# Altium PCB PicoROM.PcbDoc
Units mm, origin at the board's own origin, x right, y up, seen from the top; angles counter-clockwise.
Board outline 30.97 x 12.2 mm, 4 copper layers (Top Layer, Inner 1, Inner 2, Bottom Layer), stack 0.97 mm thick; 58 components, 157 nets, 379 pads, 126 vias.
Unrouted connection lines stored in the file: 10.
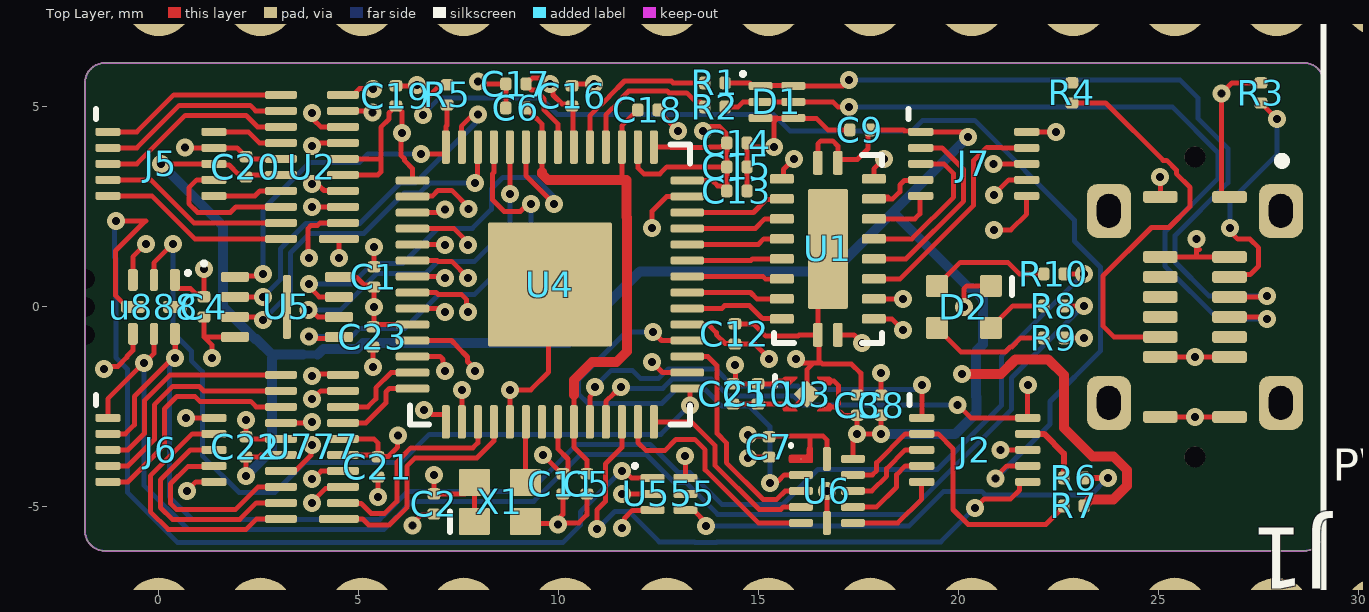
[diagram p0: Top Layer view]
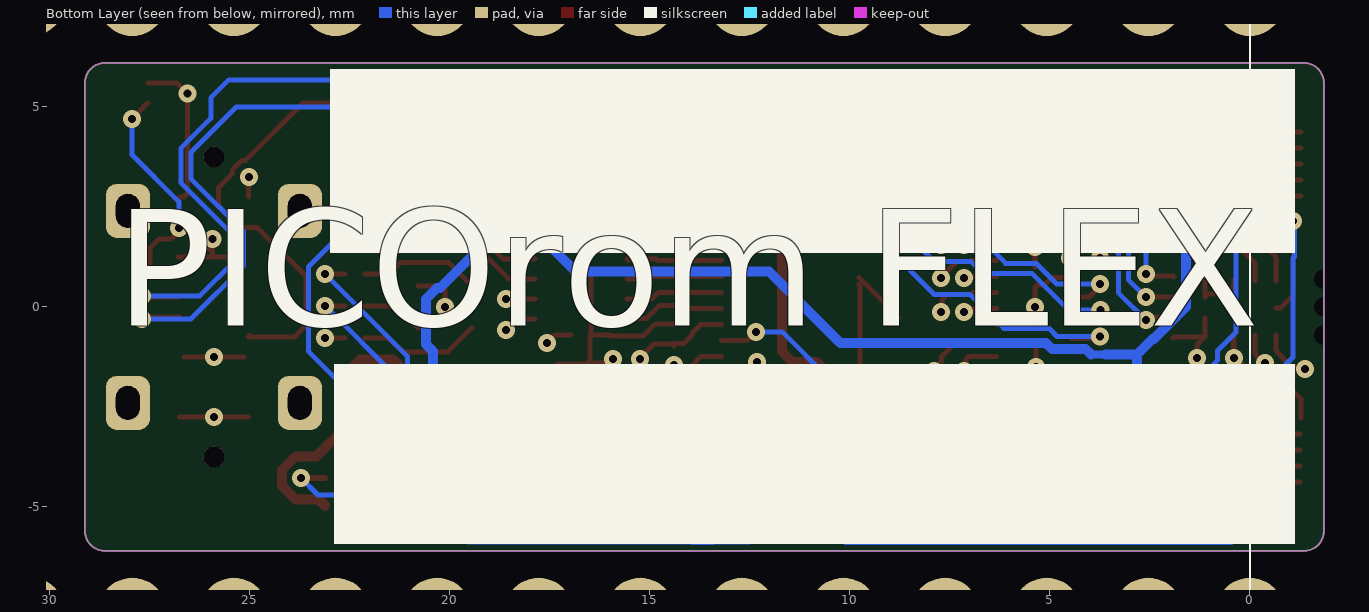
[diagram p1: Bottom Layer view, seen from below]
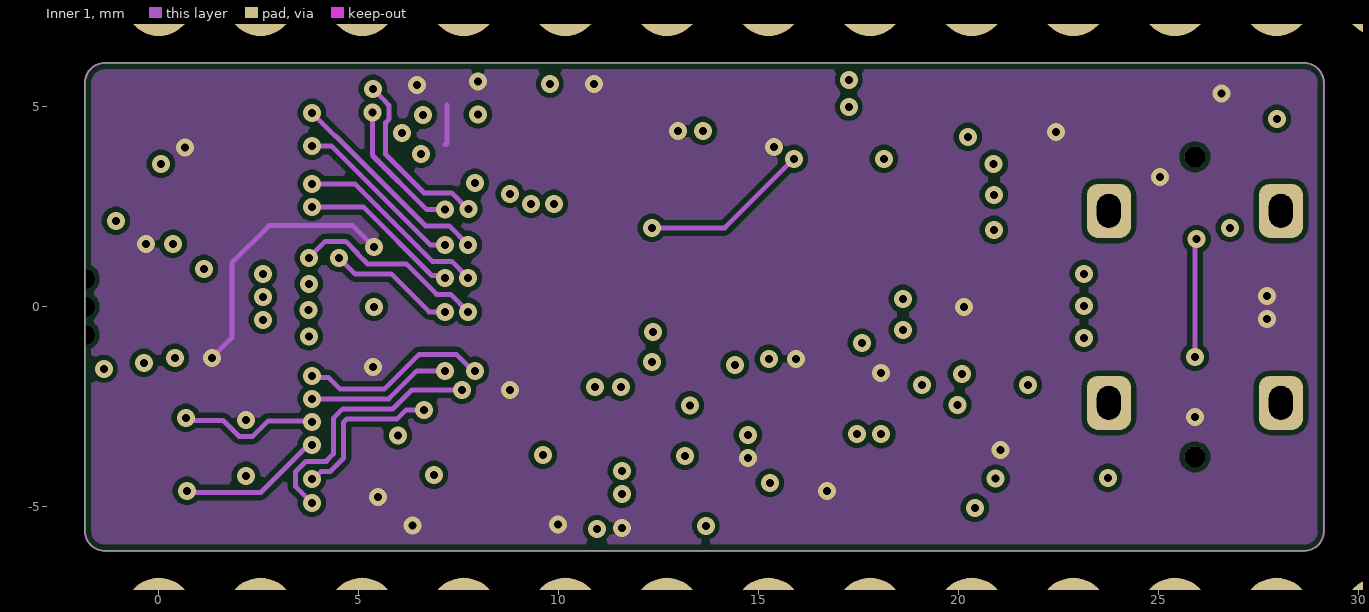
[diagram p2: Inner 1]
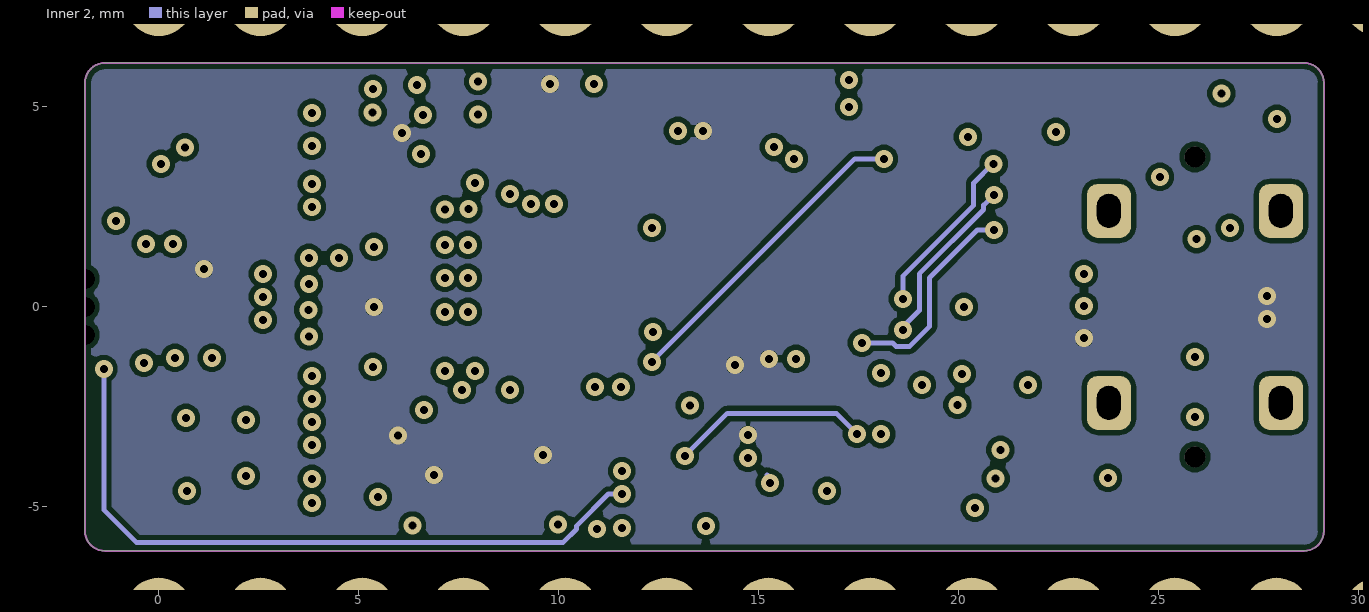
[diagram p3: Inner 2]

## Layer stack, top to bottom
F.Mask: solder mask 0.0102, Solder Resist, Dk 3.5
Top Layer: signal copper 0.035
Dielectric 1: dielectric 0.16, FR-4, Dk 4.8
Inner 1: signal copper 0.035
Dielectric3: dielectric 0.51, FR-4, Dk 4.8
Inner 2: signal copper 0.035
Dielectric5: dielectric 0.16, FR-4, Dk 4.8
Bottom Layer: signal copper 0.035
B.Mask: solder mask 0.0102, Solder Resist, Dk 3.5

## Board outline
-1.85,-5.6 -1.85,5.6 cw(c-1.35,5.6) -1.35,6.1 28.625,6.1 cw(c28.625,5.6) 29.125,5.6 29.125,-5.6 cw(c28.625,-5.6) 28.625,-6.1 -1.35,-6.1 cw(c-1.35,-5.6)

## Design rules (kind name [scope] priority, off if disabled: settings)
Clearance [All] p1: gap=0.125 ignorepadtopadclearanceinfootprint=FALSE
MinimumSolderMaskSliver [All] p1: minsoldermaskwidth=0
PolygonConnect Polygon_In2.Cu-+3V3_ConnectDirect [IsNamedPolygon('In2.Cu-+3V3') vs IsVia] p1: connectstyle=Direct reliefconductorwidth=0.254 reliefentries=4 polygonreliefangle="90 Angle" airgapwidth=0.254
PolygonConnect Polygon_In2.Cu-+3V3_ConnectRelief45 [IsNamedPolygon('In2.Cu-+3V3') vs (IsThruPin or IsSMTPin) and (PadShape_AllLayers = 'Round')] p2: connectstyle=Relief reliefconductorwidth=0.5 reliefentries=4 polygonreliefangle="45 Angle" airgapwidth=0.5
PolygonConnect Polygon_In2.Cu-+3V3_ConnectRelief90 [IsNamedPolygon('In2.Cu-+3V3') vs (IsThruPin or IsSMTPin) and (PadShape_AllLayers <> 'Round')] p3: connectstyle=Relief reliefconductorwidth=0.5 reliefentries=4 polygonreliefangle="90 Angle" airgapwidth=0.5
PolygonConnect Polygon_In4.Cu-GND_ConnectDirect [IsNamedPolygon('In4.Cu-GND') vs IsVia] p4: connectstyle=Direct reliefconductorwidth=0.254 reliefentries=4 polygonreliefangle="90 Angle" airgapwidth=0.254
PolygonConnect Polygon_In4.Cu-GND_ConnectRelief45 [IsNamedPolygon('In4.Cu-GND') vs (IsThruPin or IsSMTPin) and (PadShape_AllLayers = 'Round')] p5: connectstyle=Relief reliefconductorwidth=0.508 reliefentries=4 polygonreliefangle="45 Angle" airgapwidth=0.508
PolygonConnect Polygon_In4.Cu-GND_ConnectRelief90 [IsNamedPolygon('In4.Cu-GND') vs (IsThruPin or IsSMTPin) and (PadShape_AllLayers <> 'Round')] p6: connectstyle=Relief reliefconductorwidth=0.508 reliefentries=4 polygonreliefangle="90 Angle" airgapwidth=0.508
PolygonConnect Polygon_In1.Cu-GND_ConnectDirect [IsNamedPolygon('In1.Cu-GND') vs IsVia] p7: connectstyle=Direct reliefconductorwidth=0.254 reliefentries=4 polygonreliefangle="90 Angle" airgapwidth=0.254
PolygonConnect Polygon_In1.Cu-GND_ConnectRelief45 [IsNamedPolygon('In1.Cu-GND') vs (IsThruPin or IsSMTPin) and (PadShape_AllLayers = 'Round')] p8: connectstyle=Relief reliefconductorwidth=0.508 reliefentries=4 polygonreliefangle="45 Angle" airgapwidth=0.508
PolygonConnect Polygon_In1.Cu-GND_ConnectRelief90 [IsNamedPolygon('In1.Cu-GND') vs (IsThruPin or IsSMTPin) and (PadShape_AllLayers <> 'Round')] p9: connectstyle=Relief reliefconductorwidth=0.508 reliefentries=4 polygonreliefangle="90 Angle" airgapwidth=0.508
PolygonConnect Polygon_F.Cu-+3V3_ConnectDirect [IsNamedPolygon('F.Cu-+3V3')] p10: connectstyle=Direct reliefconductorwidth=0.254 reliefentries=4 polygonreliefangle="90 Angle" airgapwidth=0.254
PolygonConnect Polygon_F.Cu-GND_ConnectDirect [IsNamedPolygon('F.Cu-GND')] p11: connectstyle=Direct reliefconductorwidth=0.254 reliefentries=4 polygonreliefangle="90 Angle" airgapwidth=0.254
RoutingVias [All] p1: holewidth=0.25 width=0.45 viastyle="Through Hole" minholewidth=0.2 minwidth=0.45 maxholewidth=0.4 maxwidth=0.8
SilkToSilkClearance [All] p1: silktosilkclearance=0
SilkToSolderMaskClearance [IsPad] p1: minsilkscreentomaskgap=0 clearancetoexposedcopper=TRUE
SolderMaskExpansion [All] p1: expansion=0.102 istentingtop=FALSE
SupplyNets "Schematic Supply Nets_9" [InNet('EXTRES')] p1: voltage=0.000
SupplyNets "Schematic Supply Nets_8" [InNet('RESET')] p2: voltage=0.000
SupplyNets "Schematic Supply Nets_7" [InNet('VUSB')] p3: voltage=0.000
SupplyNets "Schematic Supply Nets_6" [InNet('BOOT')] p4: voltage=0.000
SupplyNets "Schematic Supply Nets_5" [InNet('SWD')] p5: voltage=0.000
SupplyNets "Schematic Supply Nets_4" [InNet('SWC')] p6: voltage=0.000
SupplyNets "Schematic Supply Nets_3" [InNet('P1V1')] p7: voltage=0.000
SupplyNets "Schematic Supply Nets_2" [InNet('GND')] p8: voltage=0.000
SupplyNets "Schematic Supply Nets_1" [InNet('P3V3')] p9: voltage=0.000
SupplyNets "Schematic Supply Nets" [InNet('P5V')] p10: voltage=0.000
Width [All] p1: maxlimit=5 minlimit=0.125 preferedwidth=0.125
27 further rules are at their usual default settings.

## Classes and differential pairs
component class 2716-2736: *1 J8 J9 J11 J12

## Components (designator, comment, footprint, x,y, rotation, side; value= is the part's Value field where it differs from the comment)
C1 "CAP0201" CAPC0201 5.375,0.75 r90 top
C2 "CAP0201" CAPC0201 6.875,-4.925 r270 top
C3 "CAP0201" CAPC0201 17.457,-2.457 r90 top
C4 "CAP0201" CAPC0201 1.125,0 r270 top
C5 "CAP0201" CAPC0201 10.7,-4.425 r270 top
C6 "CAP0201" CAPC0201 8.925,4.975 r180 top
C7 "CAP0201" CAPC0201 15.25,-3.5 r270 top
C8 "CAP0201" CAPC0201 18.057,-2.457 r90 top
C9 "CAP0201" CAPC0201 17.525,4.425 r180 top
C10 "CAP0201" CAPC0201 14.975,-2.175 r270 top
C11 "CAP0201" CAPC0201 10.1,-4.425 r270 top
C12 "CAP0201" CAPC0201 14.4,-0.675 r90 top
C13 "CAP0201" CAPC0201 14.45,2.9 r0 top
C14 "CAP0201" CAPC0201 14.45,4.1 r0 top
C15 "CAP0201" CAPC0201 14.45,3.5 r0 top
C16 "CAP0201" CAPC0201 10.325,5.275 r90 top
C17 "CAP0201" CAPC0201 8.925,5.575 r180 top
C18 "CAP0201" CAPC0201 12.225,4.925 r0 top
C19 "CAP0201" CAPC0201 5.925,5.275 r90 top
C20 "CAP0201" CAPC0201 2.175,3.5 r90 top
C21 "CAP0201" CAPC0201 5.475,-4 r270 top
C22 "CAP0201" CAPC0201 2.175,-3.5 r90 top
C23 "CAP0201" CAPC0201 5.35,-0.75 r270 top
C24 "CAP0201" CAPC0201 24.325,13.825 r270 top
C25 "CAP0201" CAPC0201 14.35,-2.175 r270 top
D1 "CDDFN6-3312P" SON40P100X50-6L 15.45,5.125 r0 top
D2 "RGB" LED-1616-RGB 20.125,0 r0 top
J1 "CONN-SAMESKY-UJ20-C-V-G-SMT-P16-TR" CONN-SAMESKY-UJ20-C-V-G-SMT-P16-TR 25.9,0 r270 top
J2 "CONN-HIROSE-DF37NC-10DS" CONN-HIROSE-DF37NC-10DS 20.395,-3.575 r0 top
J3 "Conn_01x16" PinHeader_1x16_P2.54mm_Vertical 38.1,7.62 r270 bottom
J4 "Conn_01x16" PinHeader_1x16_P2.54mm_Vertical 38.1,-7.62 r270 bottom
J5 "CONN-HIROSE-DF37NC-10DS" CONN-HIROSE-DF37NC-10DS 0.05,3.575 r0 top locked
J6 "CONN-HIROSE-DF37NC-10DS" CONN-HIROSE-DF37NC-10DS 0.05,-3.575 r0 top locked
J7 "CONN-HIROSE-DF37NC-10DS" CONN-HIROSE-DF37NC-10DS 20.37,3.575 r0 top
J8 "CONN-HIROSE-DF37C-10DP-04V" CONN-HIROSE-DF37NC-10DS 47.166,-2.202 r0 top
J9 "CONN-HIROSE-DF37C-10DP-04V" CONN-HIROSE-DF37NC-10DS 42.9,-6.875 r0 top
J11 "CONN-HIROSE-DF37C-10DP-04V" CONN-HIROSE-DF37NC-10DS 45.05,4.25 r0 top
J12 "CONN-HIROSE-DF37C-10DP-04V" CONN-HIROSE-DF37NC-10DS 47.225,-7.825 r0 top
R1 "RESC0201" RESC0201 13.9,5.6 r180 top value=27R
R2 "RESC0201" RESC0201 13.9,5 r180 top value=27R
R3 "RESC0201" RESC0201 27.55,5.35 r270 top value=5K1
R4 "RESC0201" RESC0201 22.825,5.35 r90 top value=5K1
R5 "RESC0201" RESC0201 7.205,5.3 r270 top value=1K
R6 "RESC0201" RESC0201 22.875,-4.275 r0 top value=27R
R7 "RESC0201" RESC0201 22.875,-4.975 r0 top value=100K
R8 "RESC0201" RESC0201 22.375,0.025 r0 top value=1K
R9 "RESC0201" RESC0201 22.375,-0.775 r0 top value=1K
R10 "RESC0201" RESC0201 22.375,0.825 r0 top value=1K
U1 "74AHCT245" QFN50P450X250-20TH300X100 16.725,1.45 r0 top
U2 "IC-TI-TXB0108-DQS" SON40P200X55-20N 3.825,3.5 r180 top locked
U3 "TPS7A0233PDQNR" X2SON4-1X1 16.207,-2.182 r0 top
U4 "IC-RPI-RP2040-PICOROM" QFN40P700X700X90-56N-TH310X310 9.775,0.56 r0 top locked
U5 "IC-WINBOND-W25Q128JVS" SON50P300X60_HS-9N 3.2,0 r0 top locked
U6 "IC-TI-TXB0104-RUT" FOOTPRINT-TI-RUT 16.7,-4.6 r0 top
U555 "74LVC1G126" SON40P100X50-6L 12.75,-4.675 r0 top
U777 "IC-TI-TXB0108-DQS" SON40P200X55-20N 3.825,-3.5 r180 top locked
u888 "TCA5405RUGR" PQFN50P150X150X40-8N -0.125,0 r270 top (schematic designator U888)
X1 "XOSC" XOSC-YXC-2016 8.525,-4.875 r0 top locked

## Footprints (in the part's own frame and the unit in brackets; to place one, negate y for a bottom-side part, rotate by r counter-clockwise, add the part's x,y. Pads: shape width x height; smd on the part's side, far side on the other; paste and mask are expansions set on the pad)
CAPC0201 [mm]
  rrect50% 0.28x0.32 smd mask+0.05: 1(-0.253,0) 2(0.253,0)
  body extent -0.32,-0.16 0.31,0.17, height 0.33
CONN-HIROSE-DF37NC-10DS [mm]
  rrect50% 0.63x0.2 smd paste-2539.97 mask+0.05: 1(-1.325,0.8) 2(1.325,0.8) 3(-1.325,0.4) 4(1.325,0.4) 5(-1.325,0) 6(1.325,0) 7(-1.325,-0.4) 8(1.325,-0.4) 9(-1.325,-0.8) 10(1.325,-0.8)
  silkscreen extent -1.63,1.12 -1.63,1.38, body extent -1.49,-2.11 1.49,2.11, height 0.99
CONN-SAMESKY-UJ20-C-V-G-SMT-P16-TR [mm]
  rrect50% 0.3x0.87 smd mask+0.05: A1(-2.75,0.865) A4(-1.25,0.865) A5(-0.75,0.865) A6(-0.25,0.865) A7(0.25,0.865) A8(0.75,0.865) A9(1.25,0.865) A12(2.75,0.865) B1(2.75,-0.865) B4(1.25,-0.865) B5(0.75,-0.865) B6(0.25,-0.865) B7(-0.25,-0.865) B8(-0.75,-0.865) B9(-1.25,-0.865) B12(-2.75,-0.865)
  rrect50% 1.35x1.1 hole 0.6 slot 0.85 at 0 deg mask+0.1: SH1(-2.4,2.15) SH2(2.4,2.15) SH3(-2.4,-2.15) SH4(2.4,-2.15)
  round 0.52 hole 0.52 unplated mask+0.15: ""(-3.75,0) ""(3.75,0)
  silkscreen extent -3.75,2.08 -3.55,2.27, body extent -4.48,-2.3 4.47,2.3, height 6.41
FOOTPRINT-TI-RUT [mm] "R-PUQFN-N12, TI RUT"
  round 0.025 smd paste+0 mask+0.05: 1(-0.65,0.8)
  rrect50% 0.6x0.2 smd paste+0 mask+0.05: 2(-0.65,0.4) 3(-0.65,0) 4(-0.65,-0.4) 5(-0.65,-0.8) 7(0.65,-0.8) 8(0.65,-0.4) 9(0.65,0) 10(0.65,0.4) 11(0.65,0.8)
  rrect50% 0.2x0.6 smd paste+0 mask+0.05: 6(0,-0.8) 12(0,0.8)
  Top Layer region: -0.9,0.9 -0.919,0.896 -0.935,0.885 -0.946,0.869 -0.95,0.85 -0.95,0.85 -0.95,0.75 -0.946,0.731 -0.935,0.715 -0.919,0.704 -0.9,0.7 -0.9,0.7 -0.4,0.7 -0.381,0.704 -0.365,0.715 -0.354,0.731 -0.35,0.75 -0.35,0.75 -0.35,1.05 -0.354,1.069 -0.365,1.085 -0.381,1.096 -0.4,1.1 -0.4,1.1 -0.45,1.1 -0.469,1.096 -0.485,1.085 -0.496,1.069 -0.5,1.05 -0.5,1.05 -0.5,0.95 -0.504,0.931 -0.515,0.915 -0.531,0.904 -0.55,0.9 -0.55,0.9
  silkscreen extent -0.9,1.12 -0.9,1.15, body extent -0.85,-1 0.85,1, height 0.55
LED-1616-RGB [mm]
  rrect18% 0.55x0.55 smd paste+0 mask+0.05: 1(0.675,0.525) 2(-0.675,0.525) 3(-0.675,-0.525) 4(0.675,-0.525)
  silkscreen extent 1.2,0.3 1.2,0.72, body extent -0.8,-0.8 0.8,0.8, height 0.71
PinHeader_1x16_P2.54mm_Vertical [mm]
  round 1.7 hole 1 paste-2539.97 mask+0.051: 1(0,0)
  rrect100% 1.7x1.7 hole 1 paste-2539.97 mask+0.051: 2(0,2.54) 3(0,5.08) 4(0,7.62) 5(0,10.16) 6(0,12.7) 7(0,15.24) 8(0,17.78) 9(0,20.32) 10(0,22.86) 11(0,25.4) 12(0,27.94) 13(0,30.48) 14(0,33.02) 15(0,35.56) 16(0,38.1)
PQFN50P150X150X40-8N [mm] "PQFN, 8-Leads, Body 1.50x1.50mm, Pitch 0.50mm, IPC Medium Density"
  rrect50% 0.55x0.25 smd mask+0.05: 1(-0.675,0.525) 3(-0.675,-0.525) 5(0.675,-0.525) 7(0.675,0.525)
  rrect50% 0.55x0.2 smd mask+0.05: 2(-0.675,0) 6(0.675,0)
  rrect50% 0.3x0.6 smd mask+0.05: 4(0,-0.525) 8(0,0.525)
  silkscreen extent -0.9,0.8 -0.8,0.9, body extent -0.75,-0.75 0.75,0.75, height 0.4
QFN40P700X700X90-56N-TH310X310 [mm]
  rrect50% 0.84x0.2 smd mask+0.05: 1(-3.435,2.6) 2(-3.435,2.2) 3(-3.435,1.8) 4(-3.435,1.4) 5(-3.435,1) 6(-3.435,0.6) 7(-3.435,0.2) 8(-3.435,-0.2) 9(-3.435,-0.6) 10(-3.435,-1) 11(-3.435,-1.4) 12(-3.435,-1.8) 13(-3.435,-2.2) 14(-3.435,-2.6) 29(3.435,-2.6) 30(3.435,-2.2) 31(3.435,-1.8) 32(3.435,-1.4) 33(3.435,-1) 34(3.435,-0.6) 35(3.435,-0.2) 36(3.435,0.2) 37(3.435,0.6) 38(3.435,1) 39(3.435,1.4) 40(3.435,1.8) 41(3.435,2.2) 42(3.435,2.6)
  rrect50% 0.2x0.84 smd mask+0.05: 15(-2.6,-3.435) 16(-2.2,-3.435) 17(-1.8,-3.435) 18(-1.4,-3.435) 19(-1,-3.435) 20(-0.6,-3.435) 21(-0.2,-3.435) 22(0.2,-3.435) 23(0.6,-3.435) 24(1,-3.435) 25(1.4,-3.435) 26(1.8,-3.435) 27(2.2,-3.435) 28(2.6,-3.435) 43(2.6,3.435) 44(2.2,3.435) 45(1.8,3.435) 46(1.4,3.435) 47(1,3.435) 48(0.6,3.435) 49(0.2,3.435) 50(-0.2,3.435) 51(-0.6,3.435) 52(-1,3.435) 53(-1.4,3.435) 54(-1.8,3.435) 55(-2.2,3.435) 56(-2.6,3.435)
  rrect3% 3.1x3.1 smd paste-0.57 mask+0.05: 57(0,0)
  silkscreen extent -3.5,-3.5 3.5,3.5, body extent -3.5,-3.5 3.5,3.5, height 0.9
QFN50P450X250-20TH300X100 [mm]
  rrect41% 0.24x0.6 smd mask+0.051: 1(-0.25,2.15) 10(-0.25,-2.15) 11(0.25,-2.15) 20(0.25,2.15)
  rrect41% 0.6x0.24 smd mask+0.051: 2(-1.15,1.75) 3(-1.15,1.25) 4(-1.15,0.75) 5(-1.15,0.25) 6(-1.15,-0.25) 7(-1.15,-0.75) 8(-1.15,-1.25) 9(-1.15,-1.75) 12(1.15,-1.75) 13(1.15,-1.25) 14(1.15,-0.75) 15(1.15,-0.25) 16(1.15,0.25) 17(1.15,0.75) 18(1.15,1.25) 19(1.15,1.75)
  rrect10% 1x3 smd mask+0.051: 21(0,0)
  silkscreen extent -1.35,-2.35 1.35,2.35, body extent -1.25,-2.25 1.25,2.25, height 0.9
RESC0201 [mm] "RES, 0201 Chip Resistor, 2-Leads, Body 0.60x0.30mm, IPC High Density"
  rrect50% 0.28x0.32 smd mask+0.05: 1(-0.253,0) 2(0.253,0)
  body extent -0.32,-0.16 0.32,0.16, height 0.26
SON40P100X50-6L [mm] "SON, 6-Leads, Body 1.20x1.00mm, Pitch 0.40mm, IPC High Density"
  rrect50% 0.6x0.2 smd mask+0.05: 1(-0.41,0.4) 2(-0.41,0) 3(-0.41,-0.4) 4(0.41,-0.4) 5(0.41,0) 6(0.41,0.4)
  silkscreen extent -0.9,0.65 -0.8,0.75, body extent -0.55,-0.6 0.55,0.6, height 0.5
SON40P200X55-20N [mm] "SON, 20-Leads, Body 4.00x2.00mm, Pitch 0.40mm, IPC Medium Density"
  rrect50% 1x0.2 smd mask+0.05: 1(-0.675,1.8)
  rrect50% 0.8x0.2 smd mask+0.05: 2(-0.775,1.4) 3(-0.775,1) 4(-0.775,0.6) 5(-0.775,0.2) 6(-0.775,-0.2) 7(-0.775,-0.6) 8(-0.775,-1) 9(-0.775,-1.4) 10(-0.775,-1.8) 11(0.775,-1.8) 12(0.775,-1.4) 13(0.775,-1) 14(0.775,-0.6) 15(0.775,-0.2) 16(0.775,0.2) 17(0.775,0.6) 18(0.775,1) 19(0.775,1.4) 20(0.775,1.8)
  body extent -1.05,-2 1.05,2, height 0.55
SON50P300X60_HS-9N [mm] "SON, 8-Leads, Body 2.00x3.00mm, Pitch 0.50mm, Thermal Pad 1.60x0.20mm, IPC Medium Density"
  rrect40% 0.7x0.25 smd mask+0.05: 1(-1.3,0.75) 2(-1.3,0.25) 3(-1.3,-0.25) 4(-1.3,-0.75) 5(1.3,-0.75) 6(1.3,-0.25) 7(1.3,0.25) 8(1.3,0.75)
  rrect50% 0.2x1.6 smd mask+0.05: 9(0,0)
  silkscreen extent -2.12,1.04 -2.02,1.14, body extent -1.55,-1 1.55,1, height 0.6
X2SON4-1X1 [mm] "FOOTPRINT, TI, DQN0004A X2SON4"
  round 0.025 smd mask+0.05: 1(-0.43,0.325) 2(-0.43,-0.325) 3(0.43,-0.325) 4(0.43,0.325)
  rrect4% 0.48x0.48 smd rot 45 mask+0.05: 5(0,0)
  Top Layer region: 0.43,-0.22 0.25,-0.4 0.25,-0.43 0.559,-0.43 0.579,-0.426 0.595,-0.415 0.606,-0.399 0.61,-0.379 0.61,-0.379 0.61,-0.271 0.606,-0.251 0.595,-0.235 0.579,-0.224 0.559,-0.22 0.559,-0.22 0.52,-0.22
  Top Layer region: -0.43,-0.22 -0.25,-0.4 -0.25,-0.43 -0.559,-0.43 -0.579,-0.426 -0.595,-0.415 -0.606,-0.399 -0.61,-0.379 -0.61,-0.379 -0.61,-0.271 -0.606,-0.251 -0.595,-0.235 -0.579,-0.224 -0.559,-0.22 -0.559,-0.22 -0.52,-0.22
  Top Layer region: -0.43,0.22 -0.25,0.4 -0.25,0.43 -0.559,0.43 -0.579,0.426 -0.595,0.415 -0.606,0.399 -0.61,0.379 -0.61,0.379 -0.61,0.271 -0.606,0.251 -0.595,0.235 -0.579,0.224 -0.559,0.22 -0.559,0.22 -0.52,0.22
  Top Layer region: 0.43,0.22 0.25,0.4 0.25,0.43 0.559,0.43 0.579,0.426 0.595,0.415 0.606,0.399 0.61,0.379 0.61,0.379 0.61,0.271 0.606,0.251 0.595,0.235 0.579,0.224 0.559,0.22 0.559,0.22 0.52,0.22
  silkscreen extent -0.8,0.2 -0.8,0.46, body extent -0.5,-0.5 0.5,0.5, height 0.4
XOSC-YXC-2016 [mm] "YSO110TR"
  rrect10% 0.775x0.675 smd paste+0 mask+0.05: 1(-0.637,-0.487) 2(0.637,-0.487) 3(0.637,0.487) 4(-0.637,0.487)
  silkscreen extent -1.25,-0.75 -1.25,-0.24, body extent -1,-0.8 1,0.8, height 0.76

## Part data
C1 C2 C3 C4 C5 C6 C7 C8 C9 C10 C11 C12 C13 C14 C15 C16 C17 C18 C19 C20 C21 C22 C23 C24 C25: library part CAPC-0201-100nF-16V, "CAPACITOR,CERAMIC,100nF,16V,X7R,0201", Capacitance=100nF, Dielectric=X7R, LCSC=C668346, Package / Case=0402, Supplier Part Number 1=490-GRM033Z71C104KE14DCT-ND, Voltage=16V, Supplier 1=Digikey
D1: library part TVS-BOURNS-CDDFN6-3312P, LCSC=C3700524
D2: library part LED-TOGIALED-TJ-S1615CY6TGLCCSRGB-A5, LCSC=C601684, MFR=KINGBRIGHT, MPN=APTF1616SEKJ3ZGKQBKC
J1: LCSC=C2686963, MFR=SAMESKY, MPN=UJ20-C-V-G-SMT-P16-TR, Package=None, Availability=Unavailable, MP=UJ20-C-V-G-SMT-P16-TR, Price=None
J2 J5 J6 J7: LCSC=C324718
J8 J9 J11 J12: LCSC=C324719
R1 R2 R6: library part RESC-0201-27R-1%-1/10W, "RESISTOR,27R,1%,63mW,0201", LCSC=C473051, Power=1/16W, Tolerance=1%
R3 R4: library part RESC-0201-5K1-1%-1/10W, "RESISTOR,5K1,1%,63mW,0201", LCSC=C274341, Power=1/16W, Tolerance=1%
R5 R8 R9 R10: library part RESC-0201-1K-1%-1/10W, "RESISTOR,1K,1%,63mW,0201", LCSC=C138165, Power=1/16W, Tolerance=1%
R7: library part RESC-0201-100K-1%-1/10W, "RESISTOR,100K,1%,63mW,0201", LCSC=C106224, Power=1/16W, Tolerance=1%
U1: library part IC-NEXPERIA-74AHCT245
U3: library part IC-TI-TPS7A0233PDQNR, LCSC=C2860046
U4: LCSC=C2040
U555: library part IC-DIODES-74LVC1G126-SON6, MPN=C163712
u888: library part IC-TI-TCA5405RUGR, MPN=C2674123
X1: library part XOSC-YXC-OT201612MJBA4SL, "XTAL,4PIN", LCSC=C669076

## Free pads (board coordinates)
  rrect0% 0x0 hole 0.5 unplated paste-2539.97 mask+0.15: MB(-1.85,-0.7) MB(-1.85,0) MB(-1.85,0.7)

## Via types
v1: diameter 0.45, hole 0.2, Top Layer to Bottom Layer, tented both sides, 126 vias

## Nets (pads, with @x,y where several pads share a name; then routed paths per layer and width w, separated by ;. In a path a pad name is that pad's centre, name@x,y a point inside that pad or via, vN(x,y) a via of type N, cw(c..) or ccw(c..) an arc to the next point about the centre after c; other vN are vias at no path point)
A0: U2.10 U4.2 | length 7.3
  Top Layer w0.125: U2.10@4.325,5.3 4.9,5.3 4.938,5.338 4.938,5.383 5.011,5.456 5.344,5.456 v1(5.35,5.45) ; U4.2 6.35,2.77 6.836,2.77 6.979,2.913 7.321,2.913 7.736,2.497 v1(7.736,2.447)
  Inner 1 w0.125: v1(5.35,5.45) 5.67,5.13 5.67,5.117 5.754,5.033 5.754,4.692 5.67,4.608 5.67,3.809 6.629,2.85 7.321,2.85 7.724,2.447 v1(7.736,2.447)
A1: U2.9 U4.3 | length 5.3
  Top Layer w0.125: U2.9@4.325,4.9 5.304,4.9 v1(5.342,4.862) ; U4.3 6.985,2.36 7.062,2.437 v1(7.15,2.437)
  Inner 1 w0.125: v1(5.342,4.862) 5.342,3.783 6.688,2.437 v1(7.15,2.437)
A2: U2.8 U4.4 | length 7.6
  Top Layer w0.125: v1(3.825,4.85) 3.887,4.788 3.887,4.661 4.048,4.5 U2.8@4.325,4.5 ; U4.4 6.952,1.96 6.954,1.962 7.375,1.962 7.725,1.612 v1(7.725,1.55)
  Inner 1 w0.125: v1(3.825,4.85) 4.4,4.275 4.414,4.275 6.664,2.025 7.258,2.025 7.725,1.558 v1(7.725,1.55)
A3: U2.7 U4.5 | length 5.7
  Top Layer w0.125: v1(3.825,4.025) 3.913,4.025 3.988,4.1 U2.7@4.325,4.1 ; U4.5 7.14,1.56 v1(7.15,1.55)
  Inner 1 w0.125: v1(3.825,4.025) 4.31,4.025 6.785,1.55 v1(7.15,1.55)
A4: U2.4 U4.6 | length 7.3
  Top Layer w0.125: v1(3.825,3.075) 3.887,3.013 4.023,3.013 4.125,2.911 4.564,2.911 U2.4@4.575,2.9 ; U4.6 6.957,1.16 6.979,1.137 7.321,1.137 7.725,0.733 v1(7.725,0.725)
  Inner 1 w0.125: v1(3.825,3.075) 4.9,3.075 6.837,1.137 7.321,1.137 7.725,0.733 v1(7.725,0.725)
A5: U2.3 U4.7 | length 5.4
  Top Layer w0.125: v1(3.825,2.5) U2.3@4.325,2.5 ; U4.7 7.115,0.76 v1(7.15,0.725)
  Inner 1 w0.125: v1(3.825,2.5) 5.111,2.5 6.824,0.787 7.088,0.787 v1(7.15,0.725)
A6: U2.2 U4.8 | length 8.3
  Top Layer w0.125: v1(3.75,1.225) 3.73,1.245 3.73,1.964 3.803,2.037 3.971,2.037 4.033,2.1 U2.2@4.575,2.1 ; U4.8 6.932,0.36 6.979,0.312 7.562,0.312 7.696,0.179 7.696,-0.096 v1(7.725,-0.125)
  Inner 1 w0.125: v1(3.75,1.225) 4.163,1.637 4.671,1.637 4.963,1.346 4.963,1.329 5.217,1.075 6.183,1.075 6.945,0.312 7.296,0.312 7.725,-0.117 v1(7.725,-0.125)
A7: U2.1 U4.9 | length 4.5
  Top Layer w0.125: v1(4.5,1.225) U2.1 ; U4.9 6.977,-0.04 7.062,-0.125 v1(7.15,-0.125)
  Inner 1 w0.125: v1(4.5,1.225) 4.9,0.825 5.808,0.825 6.757,-0.125 v1(7.15,-0.125)
A8: U4.11 U777.10 | length 7.5
  Top Layer w0.125: v1(3.825,-1.725) 3.873,-1.677 4.577,-1.677 U777.10 ; U4.11 7.315,-0.84 7.458,-0.983 7.458,-0.995 7.715,-1.252 7.715,-1.364 7.9,-1.549 v1(7.9,-1.6)
  Inner 1 w0.125: v1(3.825,-1.725) 3.862,-1.762 4.237,-1.762 4.525,-2.05 5.645,-2.05 6.507,-1.187 7.437,-1.187 7.775,-1.525 7.825,-1.525 v1(7.9,-1.6)
A9: U4.12 U777.9 | length 5.5
  Top Layer w0.125: v1(3.825,-2.3) 3.848,-2.3 4.048,-2.1 U777.9@4.575,-2.1 ; U4.12 7.03,-1.24 7.103,-1.313 7.103,-1.553 v1(7.15,-1.6)
  Inner 1 w0.125: v1(3.825,-2.3) 5.748,-2.3 6.448,-1.6 v1(7.15,-1.6)
A10: U4.13 U777.8 | length 2.3
  Top Layer w0.125: U777.8 5.225,-2.5 5.425,-2.3 5.425,-2.022 5.807,-1.64 U4.13
A11: U4.14 U777.7 | length 2.3
  Top Layer w0.125: U777.7 5.179,-2.9 5.675,-2.404 5.675,-2.126 5.761,-2.04 U4.14
A12: U4.15 U777.4 | length 5.5
  Top Layer w0.125: v1(3.825,-4.3) 3.863,-4.3 4.057,-4.106 4.594,-4.106 U777.4 ; v1(6.625,-2.575) 6.713,-2.575 6.833,-2.695 U4.15@7.175,-2.695
  Inner 1 w0.125: v1(3.825,-4.3) 3.873,-4.3 4.061,-4.113 4.288,-4.113 4.613,-3.788 4.613,-2.891 4.704,-2.8 5.955,-2.8 6.18,-2.575 v1(6.625,-2.575)
A13: U4.16 U777.3 | length 8.1
  Top Layer w0.125: v1(3.825,-4.9) 3.825,-4.883 4.171,-4.537 4.563,-4.537 U777.3 ; U4.16@7.575,-2.695 v1(7.575,-2.075)
  Inner 1 w0.125: v1(3.825,-4.9) 3.413,-4.487 3.413,-4.129 3.679,-3.863 4.184,-3.863 4.184,-3.851 4.363,-3.673 4.363,-2.787 4.6,-2.55 5.852,-2.55 6.327,-2.075 v1(7.575,-2.075)
A14: U4.17 U777.2 | length 4.9
  Top Layer w0.125: 5,-4.913 5.054,-4.913 5.304,-5.163 5.646,-5.163 5.947,-4.861 5.947,-3.881 6.175,-3.654 6.175,-3.65 6.3,-3.525 7.85,-3.525 7.975,-3.4 U4.17
A15: U4.18 U777.1 | length 6.1
  Top Layer w0.125: U777.1 5.088,-5.3 5.238,-5.45 5.765,-5.45 6.198,-5.017 6.198,-4.49 6.198,-3.985 6.407,-3.775 7.954,-3.775 8.375,-3.354 U4.18@8.375,-2.695
A16: U4.27 U6.5 | length 5.9
  Top Layer w0.125: U4.27 11.975,-3.39 12.18,-3.595 12.647,-3.595 12.929,-3.312 13.396,-3.312 13.657,-3.573 13.657,-4.072 14.985,-5.4 U6.5
A17: U4.28 U6.4 | length 4.9
  Top Layer w0.125: U4.28 12.594,-2.875 12.813,-2.875 13.312,-2.875 13.907,-3.47 13.907,-3.969 15.001,-5.063 15.549,-5.063 15.612,-5 U6.4
A_A8: J9.5
A_A9: J9.7
A_A10: J9.9
A_A11: J9.2
A_A12: J9.10
A_A13: J9.8
A_A14: J9.6
A_A15: J9.4
AA0: J8.1
AA1: J8.3
AA2: J8.5
AA3: J8.2
AA4: J8.10
AA5: J8.8
AA6: J8.7
AA7: J8.9
AA8: 
AA9: 
AA10: 
AA16: J11.9
AA17: J11.7
AB: J11.8
AC: J11.1
ACE: J11.3
AD: J11.2
AD0: 
AD1: 
AD2: 
AD3: 
AD4: 
AD5: 
AD6: 
AD7: 
AER: J11.4
AG: J8.4 J11.6
AOE: J11.5
AR: J11.10
AV: J8.6
BOOT: J2.8 R5.1 | length 27.8
  Top Layer w0.125: v1(6.6,4.8) 6.6,4.888 6.733,5.021 6.733,5.25 6.983,5.5 7.152,5.5 R5.1 ; v1(20.917,-4.292) 20.917,-4.258 21.2,-3.975 J2.8
  Bottom Layer w0.125: v1(6.6,4.8) 7.025,5.225 9.542,5.225 9.954,4.812 15.36,4.812 15.772,4.4 18.831,4.4 19.094,4.663 20.396,4.663 22.887,2.171 22.887,1.646 23.538,0.996 23.538,-1.107 22.277,-2.367 22.277,-2.931 v1(20.917,-4.292)
CE: U4.32 U6.2 | length 11.6
  Top Layer w0.125: v1(12.35,-0.625) 12.565,-0.84 U4.32 ; v1(15.275,-4.4) 15.337,-4.338 15.5,-4.338 15.637,-4.2 U6.2
  Inner 2 w0.125: v1@15.202,-4.2 15.213,-4.211 15.213,-4.338 v1(15.275,-4.4)
  Bottom Layer w0.125: v1(12.35,-0.625) 11.692,-0.625 10.487,-1.829 10.487,-2.171 10.729,-2.413 12.578,-2.413 12.943,-2.047 13.638,-2.047 14.072,-2.482 14.767,-2.482 15.275,-2.99 v1(15.275,-4.4)
D0: U1.9 U4.34 | length 2.5
  Top Layer w0.125: U4.34 14.073,-0.04 14.143,0.03 14.765,0.03 15.088,-0.292 15.567,-0.292 U1.9
D1: U1.8 U4.35 | length 2.4
  Top Layer w0.125: U4.35 14.789,0.36 14.949,0.2 U1.8
D2: U1.7 U4.36 | length 2.4
  Top Layer w0.125: U4.36 15.1,0.76 15.16,0.7 U1.7
D3: U1.6 U4.37 | length 2.4
  Top Layer w0.125: U4.37 14.8,1.16 14.84,1.2 U1.6 U1.6@15.535,1.16
D4: U1.5 U4.38 | length 2.4
  Top Layer w0.125: U4.38 14.985,1.56 15.125,1.7 U1.5
D5: U1.4 U4.39 | length 2.5
  Top Layer w0.125: U4.39 14.91,1.96 15.15,2.2 U1.4
D6: U1.3 U4.40 | length 2.5
  Top Layer w0.125: U4.40 14.864,2.36 15.187,2.683 15.558,2.683 U1.3
D7: U1.2 U4.41 | length 6.3
  Top Layer w0.125: v1(12.325,1.975) 12.327,1.977 12.327,2.392 12.695,2.76 U4.41 ; U1.2 15.609,3.234 15.609,3.434 v1(15.875,3.7)
  Inner 1 w0.125: v1(12.325,1.975) 14.15,1.975 v1(15.875,3.7)
EXT_RESET_EN: U555.1 u888.4 | length 25.1
  Top Layer w0.125: v1(-1.075,2.15) -0.325,2.15 -0.333,2.15 -1.088,1.396 -1.088,0.288 -0.775,-0.025 u888.4@-0.65,-0.025 ; v1(11.575,-4.1) 11.636,-4.1 11.811,-4.275 U555.1
  Bottom Layer w0.125: v1(-1.075,2.15) -1.113,2.112 -1.113,1.249 -1.075,1.211 -1.075,-1.267 -0.788,-1.554 -0.788,-4.637 0.463,-5.887 10.108,-5.887 10.537,-5.458 10.537,-5.129 11.567,-4.1 v1(11.575,-4.1)
EXT_RESET_VALUE: U555.2 u888.5 | length 19.4
  Top Layer w0.125: v1(-1.375,-1.55) -1.313,-1.488 -1.025,-1.488 -0.8,-1.262 -0.8,-1.242 -0.65,-1.092 u888.5@-0.65,-0.7 ; v1(11.575,-4.675) U555.2
  Inner 2 w0.125: v1(-1.375,-1.55) -1.375,-5.075 -0.563,-5.887 10.108,-5.887 10.444,-5.552 10.444,-5.473 11.242,-4.675 v1(11.575,-4.675)
EXTRES: J2.4 R6.1 | length 1.7
  Top Layer w0.15: J2.4 22.13,-3.175 22.622,-3.667 R6.1
GND: C1.2 C2.2 C3.2 C4.2 C5.2 C6.2 C7.2 C8.2 C9.2 C10.2 C11.2 C12.2 C13.2 C14.2 C15.2 C16.2 C17.2 C18.2 C19.2 C20.2 C21.2 C22.2 C23.2 C24.2 C25.2 D1.3 D1.4 D2.1 J1.A1 J1.A12 J1.B1 J1.B12 J2.6 J3.16 J5.4 J7.2 R3.1 R4.2 U1.10 U1.21 U2.15 U3.2 U3.5 U4.19 U4.57 U5.4 U6.6 U555.3 U777.15 u888.3 X1.2 | length 55.2
  Top Layer w0.125: u888.3@-0.65,0.65 -0.65,1.25 v1(-0.325,1.575) ; v1(0.65,3.988) 0.663,3.975 J5.4 1.953,3.975 2.082,3.846 2.082,3.83 2.159,3.753 C20.2 ; C4.2@1.125,-0.278 1.125,-0.75 ; v1(1.325,-1.275) 1.325,-0.95 1.125,-0.75 ; U5.4@1.921,-0.771 U5.4 1.125,-0.75 ; C22.2@2.174,-3.246 2.228,-3.3 U777.15 ; C22.2 C22.2@2.228,-3.3 ; C22.2@2.175,-3.246 v1(2.175,-2.825) ; C20.2@2.262,3.7 U2.15 ; v1(5.35,-1.5) C23.2@5.35,-0.978 ; C1.2 v1(5.375,1.5) ; v1(5.475,-4.75) C21.2 ; C19.2 6.428,5.528 v1(6.45,5.55) ; v1(6.337,-5.462) 6.337,-5.418 6.555,-5.2 C2.2@6.978,-5.2 ; v1(7.975,5.637) 8.063,5.637 8.125,5.575 C17.2 C6.2 ; U4.19@8.775,-2.695 v1(8.775,-2.075) 9.3,-2.075 9.746,-1.629 9.746,0.531 U4.57 ; U4.57@8.775,-0.26 U4.57@9.775,0.74 ; X1.2@9.162,-5.412 9.95,-5.412 v1(9.975,-5.437) ; C11.2 10.1,-5.187 9.975,-5.312 9.975,-5.4 10.5,-5.4 10.7,-5.2 10.7,-5.05 C5.2 ; C16.2 10.372,5.575 v1(10.875,5.575) ; v1(11.575,-5.525) 11.637,-5.463 11.637,-5.288 11.837,-5.088 U555.3@12.34,-5.088 ; C18.2 12.478,4.901 12.555,4.823 12.555,4.82 v1(12.975,4.4) ; C25.2 15.698,-2.428 U3.2 15.882,-2.507 U3.5 16.207,-1.559 16.36,-1.407 ; C12.2 14.864,-0.422 15.175,-0.733 15.975,-0.733 16.008,-0.7 U1.10 ; C25.2@14.425,-2.428 C25.2@14.484,-2.486 ; v1@14.688,-3.738 v1(14.725,-3.775) 14.747,-3.753 C7.2 ; C13.2 C15.2 C14.2@14.703,4.116 ; C14.2@14.703,4.084 14.78,4.007 14.812,4.007 14.822,3.997 v1(15.377,3.997) 15.377,4.629 15.46,4.712 ; D1.3 15.447,4.725 15.46,4.712 ; v1(15.925,-1.3) 15.975,-1.35 16,-1.35 16.057,-1.407 16.36,-1.407 ; U6.6@16.7,-5.606 v1(16.7,-4.6) ; U1.21@16.725,1.075 16.475,0.825 U1.10 ; C9.2 16.725,4.425 16.438,4.712 15.46,4.712 ; C3.2@17.55,-2.191 17.55,-1.65 17.532,-1.65 17.314,-1.432 16.592,-1.432 16.567,-1.407 16.453,-1.407 ; C8.2 v1(18.057,-1.657) ; v1(20.125,0) 20.125,0.452 20.198,0.525 D2.1 ; v1(21.038,-3.575) J2.6 ; J7.2 v1(22.425,4.375) ; v1(25.025,3.25) 25.035,3.24 J1.B12 ; J1.B1 v1(25.9,-2.75) J1.A12 ; J1.A1 26.649,2.75 26.562,2.837 v1(26.562,5.338) 26.828,5.603 R3.1 ; 16.36,-1.407 16.453,-1.407 ; 16.453,-1.407 16.5,-1.359 16.5,-0.725 U1.10
  Inner 1 w0.125: v1(1.325,-1.275) 1.825,-0.775 1.825,1.1 2.757,2.032 4.843,2.032 v1(5.375,1.5) ; 7.15,4.06 ccw(c7.15,4.115) 7.205,4.115 7.205,5.047
INFO_LED1: J6.1 R8.2 u888.6 | length 34.1
  Top Layer w0.125: J6.1 -1.275,-2.3 v1(-0.375,-1.4) -0.355,-1.4 -0.125,-1.17 u888.6@-0.125,-0.7 ; R8.2 v1(23.125,0.025)
  Bottom Layer w0.125: v1(-0.375,-1.4) -0.375,-4.462 0.726,-5.563 5.626,-5.563 5.905,-5.283 6.326,-4.863 9.374,-4.863 10.549,-3.687 12.176,-3.687 12.876,-4.388 13.171,-4.388 13.971,-5.188 18.692,-5.188 21.312,-2.567 21.312,-1.779 23.117,0.025 v1(23.125,0.025)
INFO_LED2: J6.3 R10.2 u888.7 | length 35.6
  Top Layer w0.125: J6.3@-1.25,-3.175 -0.84,-3.175 -0.613,-2.947 -0.613,-2.242 0.4,-1.229 0.4,-1.039 u888.7@0.4,-0.7 ; v1(0.4,-1.275) 0.414,-1.261 0.414,-0.689 u888.7 ; R10.2 v1(23.125,0.825)
  Bottom Layer w0.125: v1(0.4,-1.275) 0.4,-1.363 0.262,-1.5 0.262,-4.746 0.829,-5.313 5.522,-5.313 5.655,-5.179 6.222,-4.613 9.271,-4.613 10.446,-3.437 12.279,-3.437 12.979,-4.137 13.274,-4.137 14.074,-4.938 15.602,-4.938 16.477,-4.062 19.464,-4.062 21.062,-2.464 21.062,-1.238 v1(23.125,0.825)
IO_EXPAND: U4.29 u888.2 | length 20.7
  Top Layer w0.125: u888.2@-0.125,0.65 -0.125,1.1 v1(0.35,1.575) ; U4.29 13.238,-2.04 13.275,-2.077 v1(13.275,-2.46)
  Bottom Layer w0.125: v1(0.35,1.575) 0.35,-0.642 0.813,-1.104 0.813,-1.346 1.088,-1.621 1.088,-3.721 2.004,-4.638 2.904,-4.638 3.654,-3.887 6.062,-3.887 6.762,-3.187 12.548,-3.187 v1(13.275,-2.46)
IOA0: J5.1 U2.11 | length 4.4
  Top Layer w0.125: J5.1 -0.55,4.375 0.375,5.3 U2.11@2.775,5.3
IOA1: J5.3 U2.12 | length 4.5
  Top Layer w0.125: J5.3 -0.55,3.975 0.513,5.038 2.282,5.038 2.419,4.9 U2.12@2.775,4.9
IOA2: J5.5 U2.13 | length 4.7
  Top Layer w0.125: J5.5 -0.55,3.575 0.663,4.788 2.178,4.788 2.466,4.5 U2.13@2.775,4.5
IOA3: J5.2 U2.14 | length 1.5
  Top Layer w0.125: J5.2 2.237,4.375 2.512,4.1 U2.14@2.775,4.1
IOA4: J5.10 U2.17 | length 2.5
  Top Layer w0.125: 2.137,2.775 J5.10 2.404,2.775 2.529,2.9 U2.17
IOA5: J5.8 U2.18 | length 3.3
  Top Layer w0.125: J5.8 0.947,3.175 0.747,2.975 0.747,2.581 0.966,2.362 1.79,2.362 1.928,2.5 U2.18@2.775,2.5
IOA6: J5.7 U2.19 | length 4.5
  Top Layer w0.125: J5.7 -0.2,3.175 0.875,2.1 U2.19@2.775,2.1
IOA7: J5.9 U2.20 | length 4.5
  Top Layer w0.125: J5.9 -0.175,2.775 0.9,1.7 U2.20@2.775,1.7
IOA8: J6.5 U777.11 | length 5.6
  Top Layer w0.125: J6.5@-1.25,-3.575 -0.772,-3.575 -0.363,-3.165 -0.363,-2.345 0.283,-1.7 U777.11
IOA9: J6.7 U777.12 | length 5.7
  Top Layer w0.125: J6.7@-1.25,-3.975 -0.772,-3.975 -0.113,-3.315 -0.113,-2.449 0.349,-1.987 1.001,-1.987 1.114,-2.1 U777.12
IOA10: J6.9 U777.13 | length 5.8
  Top Layer w0.125: J6.9@-1.25,-4.375 -0.772,-4.375 0.137,-3.465 0.137,-2.552 0.452,-2.237 0.898,-2.237 1.023,-2.362 2.296,-2.362 2.433,-2.5 U777.13
IOA11: J6.2 U777.14 | length 5
  Top Layer w0.125: v1(0.675,-2.775) J6.2@1.4,-2.775 ; U777.14@3.025,-2.9 3.8,-2.9 v1(3.825,-2.875)
  Inner 1 w0.125: v1(0.675,-2.775) 0.736,-2.836 1.603,-2.836 2.004,-3.238 2.346,-3.238 2.733,-2.85 3.8,-2.85 v1(3.825,-2.875)
IOA12: J6.10 U777.17 | length 5.9
  Top Layer w0.125: v1(0.7,-4.6) v1(0.7,-4.6) 0.923,-4.375 1.4,-4.375 J6.10@1.413,-4.387 ; U777.17 3.087,-4.063 3.451,-4.063 3.801,-3.713 v1@3.801,-3.324 ; v1(3.825,-3.45) 3.825,-3.347 v1@3.801,-3.324 ; v1@3.825,-3.3 v1@3.801,-3.324
  Inner 1 w0.125: v1(0.7,-4.6) 0.738,-4.638 2.551,-4.638 3.738,-3.45 v1(3.825,-3.45)
IOA13: J6.8 U777.18 | length 4.8
  Top Layer w0.125: J6.8@1.382,-3.993 0.724,-3.993 0.288,-4.429 0.288,-4.912 0.437,-5.062 1.921,-5.062 2.483,-4.5 U777.18
IOA14: J6.6 U777.19 | length 5.6
  Top Layer w0.125: J6.6 0.788,-3.575 0.037,-4.326 0.037,-5.016 0.334,-5.312 2.024,-5.312 2.437,-4.9 U777.19
IOA15: J6.4 U777.20 | length 6.5
  Top Layer w0.125: J6.4@1.4,-3.175 0.835,-3.175 -0.213,-4.222 -0.213,-5.12 0.23,-5.562 0.28,-5.562 2.182,-5.562 2.444,-5.3 U777.20
IOA16: J2.9 U6.7 | length 2.4
  Top Layer w0.125: U6.7 18.475,-5.4 19.07,-4.805 J2.9
IOA17: J2.7 U6.8 | length 2.3
  Top Layer w0.125: U6.8 17.945,-5 18.442,-4.503 18.442,-4.193 18.66,-3.975 J2.7
IOCE: J2.3 R7.1 U6.10 | length 7.8
  Top Layer w0.125: U6.10 17.838,-4.2 17.942,-4.095 17.942,-3.893 18.66,-3.175 19.48,-3.175 19.855,-3.55 19.855,-5.063 20.229,-5.437 22.18,-5.437 22.622,-4.995 R7.1
IOD0: J7.10 U1.11 | length 7.4
  Top Layer w0.125: U1.11 17.375,-0.7 v1(17.575,-0.9) ; v1(20.875,1.925) 21.3,1.925 21.695,2.32 J7.10
  Inner 2 w0.125: v1(17.575,-0.9) 18.341,-0.9 18.429,-0.988 18.771,-0.988 19.263,-0.496 19.263,0.723 20.464,1.925 v1(20.875,1.925)
IOD1: J7.8 U1.12 | length 6.1
  Top Layer w0.125: U1.12 18.325,-0.3 v1(18.6,-0.575) ; v1(20.875,2.8) 21.25,3.175 J7.8
  Inner 2 w0.125: v1(18.6,-0.575) 18.6,-0.502 19.013,-0.089 19.013,0.827 20.62,2.434 20.62,2.545 v1(20.875,2.8)
IOD2: J7.6 U1.13 | length 6
  Top Layer w0.125: U1.13 v1(18.6,0.2) ; v1(20.87,3.575) J7.6
  Inner 2 w0.125: v1(18.6,0.2) 18.6,0.768 20.37,2.538 20.37,3.098 20.847,3.575 v1(20.87,3.575) v1@20.808,3.513
IOD3: J7.4 U1.14 | length 5.8
  Top Layer w0.125: U1.14 18.532,0.7 20.37,2.538 20.37,3.658 20.699,3.988 21.065,3.988 21.077,3.975 J7.4
IOD4: J7.3 U1.15 | length 4.9
  Top Layer w0.125: U1.15 18.679,1.2 20.12,2.641 20.12,3.434 19.579,3.975 J7.3
IOD5: J7.5 U1.16 | length 3.9
  Top Layer w0.125: U1.16 18.825,1.7 19.87,2.745 19.87,3.33 19.625,3.575 J7.5
IOD6: J7.9 U1.17 | length 1.7
  Top Layer w0.125: U1.17@17.915,2.24 U1.17 18.9,2.2 19.025,2.325 19.025,2.738 19.008,2.738 J7.9
IOD7: J7.7 U1.18 | length 1.8
  Top Layer w0.125: 18.228,2.753 17.928,2.753 U1.18 18.344,2.7 18.522,2.877 18.522,3.047 18.639,3.164 19.034,3.164 J7.7
IOOE: J2.5 U6.9 | length 2.3
  Top Layer w0.125: U6.9 17.825,-4.6 18.192,-4.233 18.192,-4.043 18.66,-3.575 J2.5
NetD1_1: D1.1 D1.6 J1.A6 J1.B6 R1.1 | length 20.7
  Top Layer w0.125: R1.1 14.765,5.6 14.803,5.562 15.015,5.562 15.04,5.538 15.847,5.538 D1.6 17.1,5.525 v1(17.25,5.675) ; J1.A6 27.675,0.25 v1(27.7,0.275)
  Bottom Layer w0.125: v1(17.25,5.675) 25.525,5.675 25.975,5.225 25.975,4.715 26.725,3.965 26.725,3.103 25.404,1.782 25.404,1.121 26.25,0.275 v1(27.7,0.275)
NetD1_2: D1.2 D1.5 J1.A7 J1.B7 R2.1 | length 20.3
  Top Layer w0.125: R2.1 14.481,5 14.606,5.125 D1.2 D1.5 16.85,5.125 16.975,5 v1(17.25,5) ; J1.A7 27.65,-0.25 v1(27.7,-0.3)
  Bottom Layer w0.125: v1(17.25,5) 25.336,5 26.475,3.861 26.475,3.207 25.154,1.886 25.154,1.017 26.471,-0.3 v1(27.7,-0.3)
NetD2_2: D2.2 R10.1 | length 3
  Top Layer w0.125: D2.2 20.038,1.113 21.225,1.113 21.512,0.825 R10.1
NetD2_3: D2.3 R9.1 | length 3.1
  Top Layer w0.125: D2.3 20.05,-1.125 21.158,-1.125 21.171,-1.113 21.175,-1.113 21.29,-0.998 21.327,-0.998 21.55,-0.775 R9.1
NetD2_4: D2.4 R8.1 | length 1.5
  Top Layer w0.125: D2.4 21.35,0.025 R8.1
NetJ1_A5: J1.A5 R3.2 | length 6.1
  Top Layer w0.125: J1.A5 26.822,0.807 27.278,0.807 27.493,1.022 27.493,1.478 27.278,1.693 26.973,1.693 26.775,1.892 v1(26.775,1.975) ; R3.2 27.566,5.097 27.643,5.02 27.643,5.004 v1(27.946,4.701)
  Bottom Layer w0.125: v1(26.775,1.975) 26.775,2.631 27.946,3.802 v1(27.946,4.701)
NetJ1_B5: J1.B5 R4.1 | length 10.1
  Top Layer w0.125: R4.1 23.671,5.097 25.106,3.663 25.196,3.663 25.438,3.421 25.438,3.331 25.783,2.986 25.783,2.514 25.255,1.987 24.815,1.987 23.6,0.771 23.6,-0.475 23.875,-0.75 J1.B5 J1.B5@24.997,-0.712
NetJ1_SH1: J1.SH1 J1.SH2 J1.SH3 J1.SH4
NetR6_2: R6.2 U555.4 | length 12.2
  Top Layer w0.125: U555.4 13.36,-5.075 13.675,-5.39 v1(13.675,-5.475)
  Top Layer w0.15: R6.2 v1(23.725,-4.275)
  Inner 1 w0.125: v1@13.675,-5.575 v1(13.675,-5.475)
  Bottom Layer w0.125: v1@13.575,-5.463 13.575,-5.5 13.601,-5.475 18.758,-5.475 19.621,-4.612 20.571,-4.612 20.663,-4.704 23.296,-4.704 v1(23.725,-4.275)
NetU1_19: U1.19 U4.30 | length 9.5
  Top Layer w0.125: v1(12.325,-1.375) 12.59,-1.64 U4.30 ; U1.19 17.875,3.45 v1(18.125,3.7)
  Inner 2 w0.125: v1(12.325,-1.375) 17.4,3.7 v1(18.125,3.7)
NetU4_20: U4.20 X1.3 | length 1.7
  Top Layer w0.125: X1.3@9.162,-4.437 9.162,-3.213 9.175,-3.2 U4.20@9.175,-2.695
OE: U4.31 U6.3 | length 5.7
  Top Layer w0.125: U4.31 13.725,-1.24 13.952,-1.468 13.952,-3.162 14.187,-3.397 14.187,-3.896 15.104,-4.813 15.446,-4.813 15.656,-4.602 16.048,-4.602 U6.3
P1V1: C5.1 C6.1 C18.1 U4.23 U4.45 U4.50 | length 14.3
  Top Layer w0.125: C6.1@9.178,4.959 9.432,4.705 9.448,4.705 9.575,4.578 U4.50 9.575,3.462 9.619,3.418 ; 10.375,-2.2 U4.23 10.375,-3.501 10.7,-3.826 C5.1 ; 11.687,3.175 11.575,3.287 U4.45 11.575,4.528 11.879,4.832 11.895,4.832 11.972,4.909 C18.1
  Top Layer w0.25: 9.575,3.374 9.575,3.325 9.725,3.175 11.687,3.175 ; 10.375,-2.2 10.375,-1.825 10.825,-1.375 11.441,-1.375 11.7,-1.116 11.7,2.236 11.685,2.251 11.685,3.165
P3V3: C1.1 C2.1 C4.1 C7.1 C10.1 C11.1 C12.1 C13.1 C14.1 C15.1 C16.1 C17.1 C19.1 C21.1 C23.1 C25.1 R9.2 U2.5 U2.6 U3.1 U4.1 U4.10 U4.22 U4.33 U4.42 U4.43 U4.44 U4.48 U4.49 U5.8 U6.1 U6.12 U777.5 U777.6 u888.1 X1.1 X1.4 | length 38.2
  Top Layer w0.125: u888.1 0.4,0.525 0.463,0.463 0.786,0.463 0.923,0.325 1.053,0.325 C4.1 v1(1.125,0.95) ; U5.8 4.517,0.733 4.944,0.733 5.127,0.55 5.322,0.55 C1.1 v1(5.375,0) ; U777.5 5.475,-3.7 5.475,-3.4 5.375,-3.3 U777.6 ; U2.5 5.477,3.3 5.55,3.373 5.55,4.488 5.754,4.692 5.754,4.851 5.832,4.929 5.832,4.945 C19.1@5.909,5.022 ; U2.6 5.531,3.7 ; C23.1 C23.1@5.375,-0.472 ; v1@5.375,-0.088 C23.1@5.375,-0.472 ; C21.1 5.486,-3.736 5.739,-3.736 5.971,-3.504 5.971,-3.218 v1(5.977,-3.212) ; C19.1 5.941,5.022 6.082,4.88 6.082,4.357 v1@6.079,4.354 ; v1(6.082,4.35) 6.05,4.317 6.05,3.79 6.143,3.697 6.143,3.654 6.34,3.457 U4.1 ; U4.10@6.327,-0.427 U4.10 5.407,-0.44 C23.1@5.375,-0.472 ; C2.1 v1(6.875,-4.2) ; C2.1@7,-4.672 7.653,-4.672 7.888,-4.437 X1.1 X1.1@7.888,-5.412 ; v1(9.6,-3.7) 9.995,-4.095 9.998,-4.095 C11.1@10.076,-4.172 ; U4.22@9.975,-2.695 9.975,-3.55 10.227,-3.802 C11.1@10.227,-4.11 ; U4.49 9.975,4.575 9.631,4.919 9.631,5.198 9.406,5.423 9.315,5.423 9.178,5.559 9.178,5.591 9.255,5.668 9.287,5.668 9.344,5.725 9.539,5.725 9.689,5.575 v1(9.775,5.575) 9.775,5.487 9.853,5.41 9.853,5.3 10.077,5.075 10.272,5.075 C16.1 ; C16.1@10.225,5.022 10.347,4.9 10.347,4.29 U4.48@10.35,4.288 ; U4.44 11.975,3.475 12.125,3.325 12.525,3.325 12.7,3.5 C15.1 ; U4.43 12.797,3.995 12.804,3.987 13.771,3.987 13.778,3.995 14.046,3.995 14.058,4.007 14.12,4.007 14.197,4.084 C14.1 ; U4.33 13.732,-0.44 13.935,-0.643 13.935,-0.694 14.155,-0.914 14.339,-0.914 C12.1@14.4,-0.975 ; U4.42 13.836,3.16 13.969,3.027 14.046,3.027 14.081,2.993 14.12,2.993 C13.1@14.197,2.916 ; v1(13.6,4.4) 13.688,4.4 13.801,4.513 14.01,4.513 14.173,4.35 14.173,4.124 C14.1 ; C13.1 C13.1@14.197,2.916 ; C25.1 C10.1 15.335,-1.922 ; v1(14.4,-1.45) 14.413,-1.463 C25.1@14.413,-1.909 ; C12.1 14.9,-0.928 15.25,-1.278 v1(15.25,-1.298) ; v1(14.725,-3.2) 14.75,-3.225 16.275,-3.225 ; 15.407,-1.85 15.335,-1.922 ; U3.1@15.77,-1.85 U3.1 15.4,-1.857 15.335,-1.922 ; 16.275,-3.575 16.275,-3.225 ; U6.12 16.7,-3.325 16.6,-3.225 16.275,-3.225 ; R9.2 v1(23.125,-0.775) ; C13.1@14.197,2.916 C15.1 ; C15.1 C14.1
P5V: C3.1 C8.1 C9.1 C20.1 C22.1 C24.1 J5.6 J7.1 R7.2 U1.1 U1.20 U2.16 U3.3 U3.4 U6.11 U555.6 U777.16 | length 65.3
  Top Layer w0.125: v1(0.05,3.575) 0.965,3.575 J5.6 1.399,3.551 1.752,3.551 1.982,3.32 2.102,3.32 C20.1 ; C20.1@2.163,3.26 2.203,3.3 U2.16 ; v1(2.175,-4.225) C22.1 2.502,-3.753 2.555,-3.7 U777.16 ; v1(13.15,-3.725) 13.16,-3.735 U555.6 ; U1.1 16.475,4.077 16.548,4.15 16.846,4.15 16.975,4.021 16.975,3.742 17.032,3.684 17.459,3.684 17.725,3.95 17.725,4.371 C9.1 18.617,4.425 18.642,4.4 19.02,4.4 J7.1 20.1,4.375 v1(20.225,4.25) ; U3.3 16.91,-2.507 ; U3.4 16.882,-1.857 16.985,-1.96 16.985,-2.433 16.91,-2.507 ; U1.20 U1.20@16.975,3.7 ; U6.11 17.35,-3.325 v1@17.493,-3.182 ; C8.1 v1(18.057,-3.182) v1@17.493,-3.182 ; 16.91,-2.507 17.113,-2.71 C3.1 17.457,-3.147 v1@17.493,-3.182
  Top Layer w0.25: v1(20.075,-1.675) 21.054,-1.675 21.42,-1.31 22.23,-1.31 22.625,-1.705 22.625,-3.025 23.34,-3.74 23.862,-3.74 24.2,-4.078 24.2,-4.472 23.862,-4.81 23.293,-4.81 23.163,-4.94 23.143,-4.94 23.128,-4.955 R7.2
  Inner 2 w0.125: v1(13.15,-3.725) 14.212,-2.662 16.937,-2.662 v1(17.45,-3.175)
  Bottom Layer w0.206: 3.604,-1.191 3.969,-1.191
  Bottom Layer w0.25: v1(0.05,3.575) 1.6,2.025 1.6,0.003 2.403,-0.8 2.434,-0.8 2.825,-1.191 2.923,-1.191 ; v1(2.175,-4.225) 2.825,-3.575 2.825,-1.289 2.923,-1.191 ; 3.604,-1.191 2.923,-1.191 ; 3.969,-1.191 4.109,-1.051 4.951,-1.051 5.101,-0.9 5.599,-0.9 10.24,-0.9 12.023,0.883 16.858,0.883 18.35,2.375 ; v1(18.057,-3.182) 19.902,-3.182 20.437,-2.647 20.437,-2.253 20.425,-2.241 20.425,-1.675 20.425,-1.109 20.6,-0.935 20.6,0.197 20.322,0.475 20.25,0.475 18.35,2.375 ; v1(20.075,-1.675) 20.425,-1.675 ; v1(20.225,4.25) 18.35,2.375
PIN_5V: J4.1
PIN_A0: J3.12
PIN_A1: J3.11
PIN_A2: J3.10
PIN_A3: J3.9
PIN_A4: J3.8
PIN_A5: J3.7
PIN_A6: J3.6
PIN_A7: J3.5
PIN_A8: J4.6
PIN_A9: J4.7
PIN_A10: J4.10
PIN_A11: J4.8
PIN_A12: J3.4
PIN_A13: J4.5
PIN_A14: J4.4
PIN_A15: J3.3
PIN_A16: J3.2
PIN_A17: J4.3
PIN_D0: J3.13
PIN_D1: J3.14
PIN_D2: J3.15
PIN_D3: J4.16
PIN_D4: J4.15
PIN_D5: J4.14
PIN_D6: J4.13
PIN_D7: J4.12
QSPI_SCLK: U4.52 U5.6 | length 8.7
  Top Layer w0.125: v1(3.734,-0.071) 3.795,-0.071 3.973,-0.25 U5.6 ; v1(8.775,2.825) U4.52
  Bottom Layer w0.125: v1(3.734,-0.071) 4.543,-0.071 5.452,0.837 6.679,0.837 6.979,1.137 7.896,1.137 8.775,2.017 v1(8.775,2.825)
QSPI_SD0: U4.53 U5.5 | length 10.7
  Top Layer w0.125: v1(3.75,-0.738) 3.805,-0.794 4.456,-0.794 U5.5 ; U4.53 8.375,3.358 8.34,3.323 8.34,2.677 8.628,2.388 9.04,2.388 9.227,2.575 v1(9.3,2.575)
  Bottom Layer w0.125: v1(3.75,-0.738) 4.821,-0.738 5.022,-0.538 6.154,-0.538 7.004,0.312 7.896,0.312 9.3,1.717 v1(9.3,2.575)
QSPI_SD1: U4.55 U5.2 | length 9.3
  Top Layer w0.125: U5.2 v1(2.6,0.25) ; U4.55@7.562,4.3 7.562,4.515 7.798,4.75 7.913,4.75 v1(7.975,4.812)
  Bottom Layer w0.125: v1(2.6,0.25) 2.608,0.25 3.037,0.679 3.037,1.449 3.676,2.087 5.026,2.087 6.038,3.1 6.414,3.1 7.913,4.599 7.913,4.75 v1(7.975,4.812)
QSPI_SD2: U4.54 U5.3 | length 9.2
  Top Layer w0.125: U5.3 2.437,-0.25 2.512,-0.325 v1(2.6,-0.325) ; v1(7.9,3.098) 7.9,3.186 7.962,3.248 U4.54@7.962,4.275
  Bottom Layer w0.125: v1(2.6,-0.325) 2.608,-0.325 3.287,0.354 3.287,1.346 3.779,1.837 5.129,1.837 6.142,2.85 6.517,2.85 6.765,3.098 v1(7.9,3.098)
QSPI_SD3: U4.51 U5.7 | length 10.5
  Top Layer w0.125: v1(3.75,0.575) 3.75,0.508 4.008,0.25 U5.7 ; U4.51 9.175,3.283 9.875,2.583 v1(9.875,2.575)
  Bottom Layer w0.125: v1(3.75,0.575) 4.836,0.575 5.349,1.088 6.104,1.088 6.979,1.963 7.836,1.963 8.313,2.439 8.313,2.946 8.604,3.238 9.398,3.238 9.838,2.798 9.838,2.612 v1(9.875,2.575)
QSPI_SS: R5.2 U4.56 U5.1 | length 8.7
  Top Layer w0.125: U5.1 1.921,0.771 2.546,0.771 v1(2.6,0.825) ; v1(6.555,3.825) 7.138,3.825 7.15,3.837 U4.56@7.15,3.995 ; U4.56 7.175,4.51 7.205,4.54 R5.2
  Bottom Layer w0.125: v1(2.6,0.825) 2.6,2.433 3.779,3.613 5.017,3.613 5.23,3.825 v1(6.555,3.825)
RESET: J2.10 U4.26 | length 14.9
  Top Layer w0.125: v1(10.95,-5.55) 10.95,-5.079 11.162,-4.867 11.162,-3.929 11.575,-3.517 U4.26 ; v1(20.4,-5.025) 20.411,-5.025 20.636,-4.8 21.295,-4.8 21.52,-4.575 21.52,-4.412 21.557,-4.375 J2.10
  Bottom Layer w0.125: v1(10.95,-5.55) 10.967,-5.55 11.404,-5.112 11.746,-5.112 12.508,-5.875 13.392,-5.875 13.404,-5.887 13.946,-5.887 13.958,-5.875 19.55,-5.875 v1(20.4,-5.025)
SWC: J2.1 U4.24 | length 10.6
  Top Layer w0.125: U4.24 10.775,-2.25 10.911,-2.114 10.911,-2.011 v1(10.9,-2) ; J2.1 19.075,-2.77 v1(19.075,-1.95)
  Bottom Layer w0.125: v1(10.9,-2) 11.313,-1.587 11.837,-1.587 12.038,-1.788 12.496,-1.788 12.736,-1.547 13.914,-1.547 14.348,-1.982 15.974,-1.982 16.063,-2.07 18.867,-2.07 18.987,-1.95 v1(19.075,-1.95)
SWD: J2.2 U4.25 | length 12.6
  Top Layer w0.125: U4.25 11.175,-2.36 11.38,-2.155 11.469,-2.155 11.55,-2.074 v1(11.55,-2) ; v1(19.962,-2.45) 19.975,-2.45 20.3,-2.775 J2.2 21.72,-1.955 v1(21.725,-1.95)
  Bottom Layer w0.125: v1(11.55,-2) 11.588,-2.038 12.599,-2.038 12.839,-1.797 13.811,-1.797 14.245,-2.232 15.871,-2.232 16.089,-2.45 v1(19.962,-2.45)
USB_N: R2.2 U4.46 | length 3.7
  Top Layer w0.125: U4.46 11.175,4.8 11.519,5.144 11.519,5.173 11.744,5.398 12.706,5.398 12.754,5.35 13.196,5.35 13.419,5.127 13.535,5.127 13.647,5.016 R2.2
USB_P: R1.2 U4.47 | length 4
  Top Layer w0.125: U4.47 10.775,4.775 11.269,5.269 11.269,5.277 11.64,5.648 12.81,5.648 12.857,5.6 R1.2
VUSB: J1.A4 J1.A9 J1.B4 J1.B9 | length 6.3
  Top Layer w0.125: J1.B4@25.15,-1.25 v1(25.9,-1.25) J1.A9@26.65,-1.25 ; J1.B9@25.404,1.25 25.934,1.25 ; v1@25.934,1.688 25.934,1.25 ; J1.A4@26.799,1.25 25.934,1.25
  Inner 1 w0.125: v1(25.9,-1.25) 25.9,1.653 v1(25.94,1.693)
{\P\I\N\_\C\E\}\: J4.11
{\P\I\N\_\O\E\}\: J4.9
pads on no net: J1. J1.A8 J1.B8 J3.1 J4.2 J9.1 J9.3 J12.1 J12.2 J12.3 J12.4 J12.5 J12.6 J12.7 J12.8 J12.9 J12.10 U4.21 U5.9 U555.5 u888.8

## Polygon pours and split planes (outlines as drawn)
GND on Inner 1 "GND_L02_P000" (solid, remove dead copper, pour order 0): -1.875,-6.15 -1.875,6.15 29.2,6.15 29.2,-6.2 27.025,-6.2
P3V3 on Inner 2 "P3V3_L03_P001" (solid, remove dead copper, pour order 1): 29.2,6.15 29.2,-6.35 -1.875,-6.35 -1.875,6.15

## Keep-outs
Edge.Cuts:
  the board outline again, w0.05

## Silkscreen, mask and mechanical layers (free items; w line width, h text height)
F.SilkS:
  circle w0.254: c40.265,-0.001 r2.052
  region: 40.667,2.022 41.054,1.904 41.411,1.714 41.723,1.457 41.98,1.145 42.17,0.788 42.288,0.401 42.318,0.099 42.327,-0.001 42.288,-0.404 42.17,-0.79 41.98,-1.147 41.723,-1.46 41.411,-1.716 41.054,-1.907 40.667,-2.024 40.365,-2.054 40.265,-2.064 39.863,-2.024 39.476,-1.907 39.119,-1.716 38.807,-1.46 38.55,-1.147 38.36,-0.79 38.242,-0.404 38.212,-0.101 38.203,-0.001 38.242,0.401 38.36,0.788 38.55,1.145 38.807,1.457 39.119,1.714 39.476,1.904 39.863,2.022 40.165,2.051 40.265,2.061
  region: 41.045,5.859 36.655,5.859 36.655,9.799 41.045,9.799
  lines w0.15: 29.118,-11.14 29.118,9.942
  lines w0.254: 36.655,5.859 41.045,5.859 41.045,9.799 36.655,9.799 36.655,5.859
  text "RESET" at 26.07,10.577 h0.8
  text "LINK" at 30.605,4.599 h0.8
  text "PWR" at 29.345,-4.341 h0.8
  text "READ" at 30.255,-6.901 h0.8
B.SilkS:
  rectangle: -1.125,-5.925 22.9,-1.425
  rectangle: -1.125,1.35 23,5.95
  lines w0.05: 0,-7.62 0,7.62
  text "PICOrom FLEX" at 28.35,-1.43 h5
Top Assembly:
  lines w0.05: -1.85,-5.6 ccw(c-1.35,-5.6) -1.35,-6.1 28.625,-6.1 ccw(c28.625,-5.6) 29.125,-5.6 29.125,5.6 ccw(c28.625,5.6) 28.625,6.1 9.5,6.1 -1.35,6.1 ccw(c-1.35,5.6) -1.85,5.6 -1.85,-5.6 ; 11.975,-4.75 11.975,-3.75 12.975,-3.75 12.975,-4.75 11.975,-4.75
  lines w0.15: -2.54,7.62 0,7.62
Route Tool Path:
  lines w1: -2.375,1.15 -2.375,3.425

## Text inside footprints (layer, text, board x,y; h text height)
D2: Top Assembly "K" at 20.525,0.25 h0.5
U3: Top Assembly "1" at 15.597,-1.957 h0.3